# Altium PCB PCB1.PcbDoc (part 1 of 2)
Units mil, origin at the board's own origin, x right, y up, seen from the top; angles counter-clockwise.
Board outline 3870 x 3210 mil, 2 copper layers (Top Layer, Bottom Layer); 94 components, 94 nets, 473 pads, 156 vias.
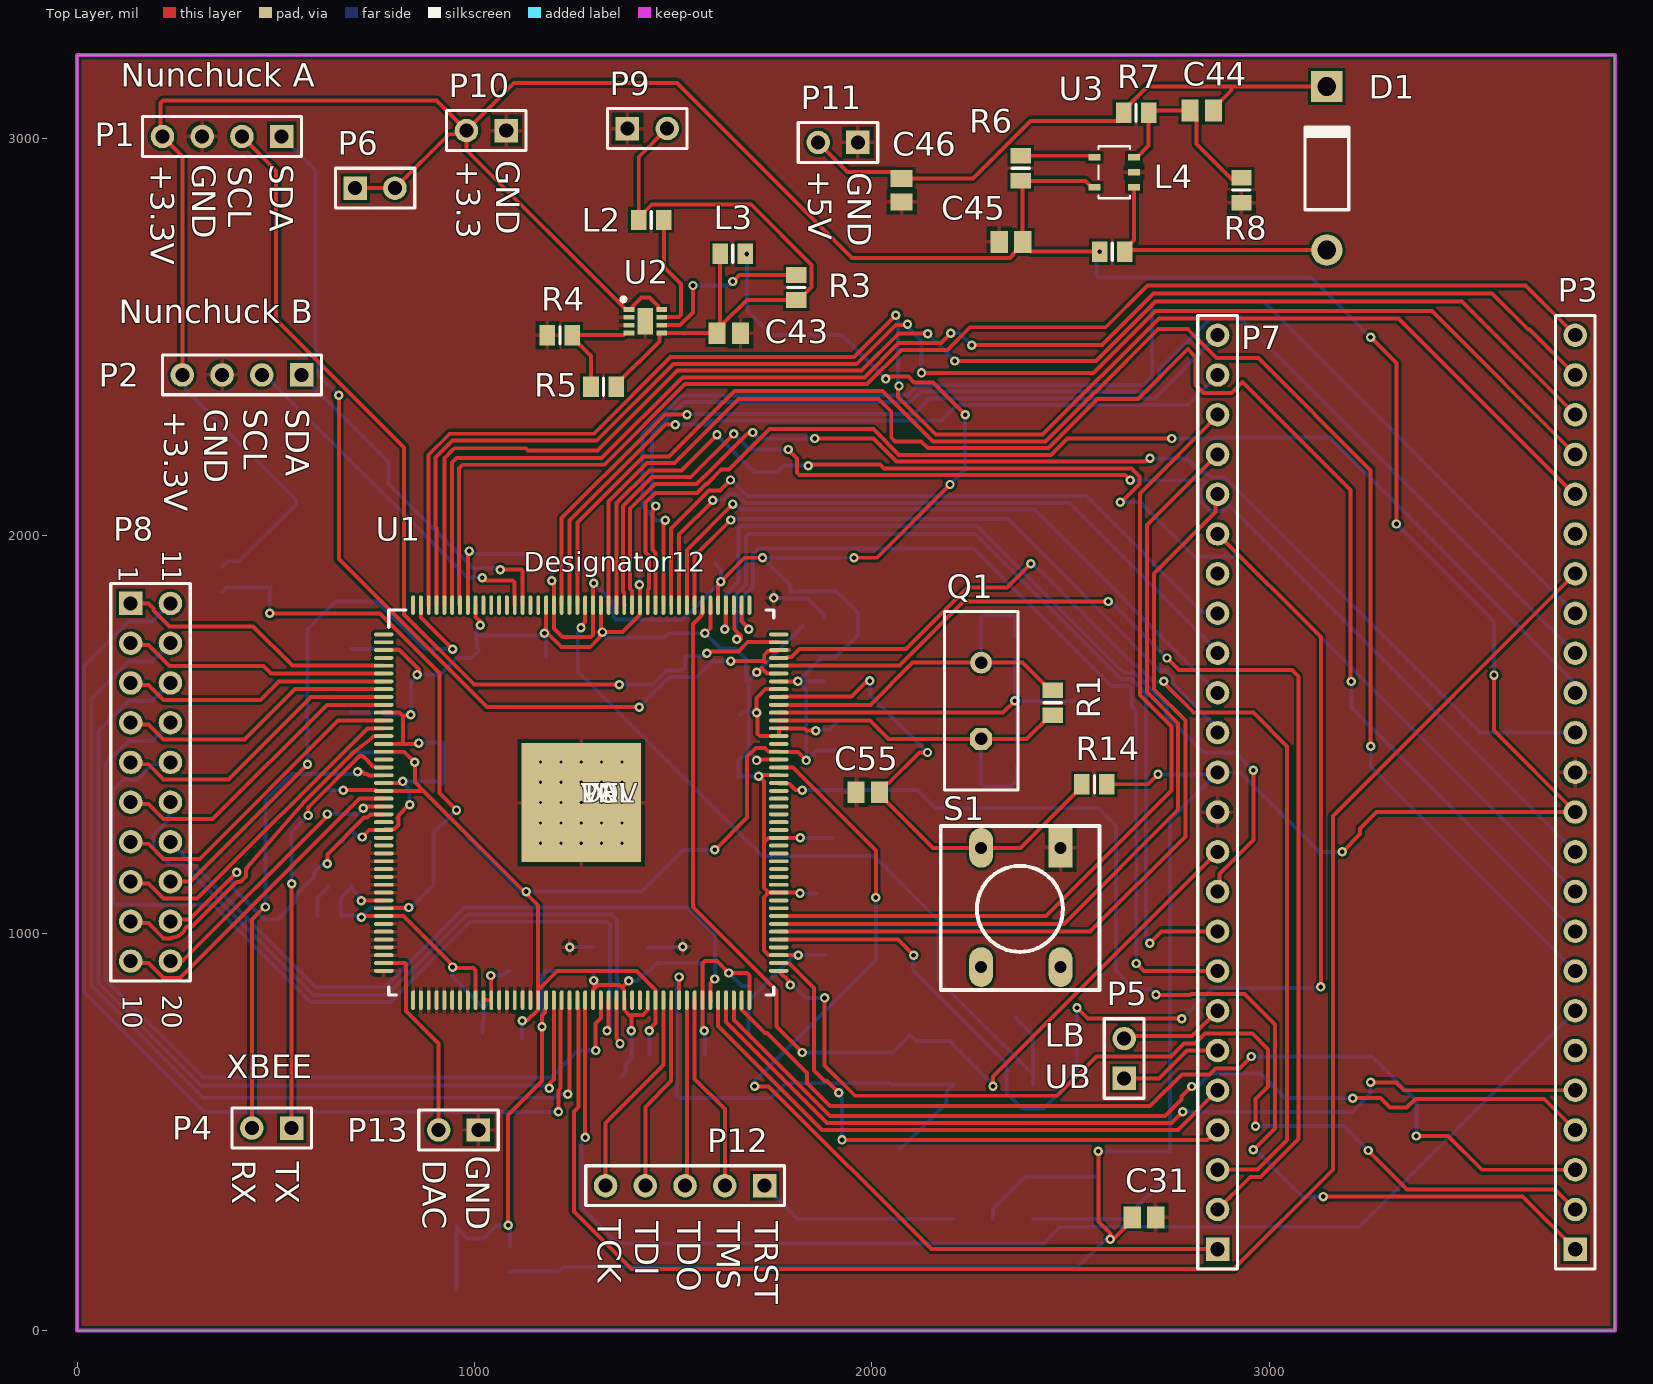
[diagram p0: Top Layer view]
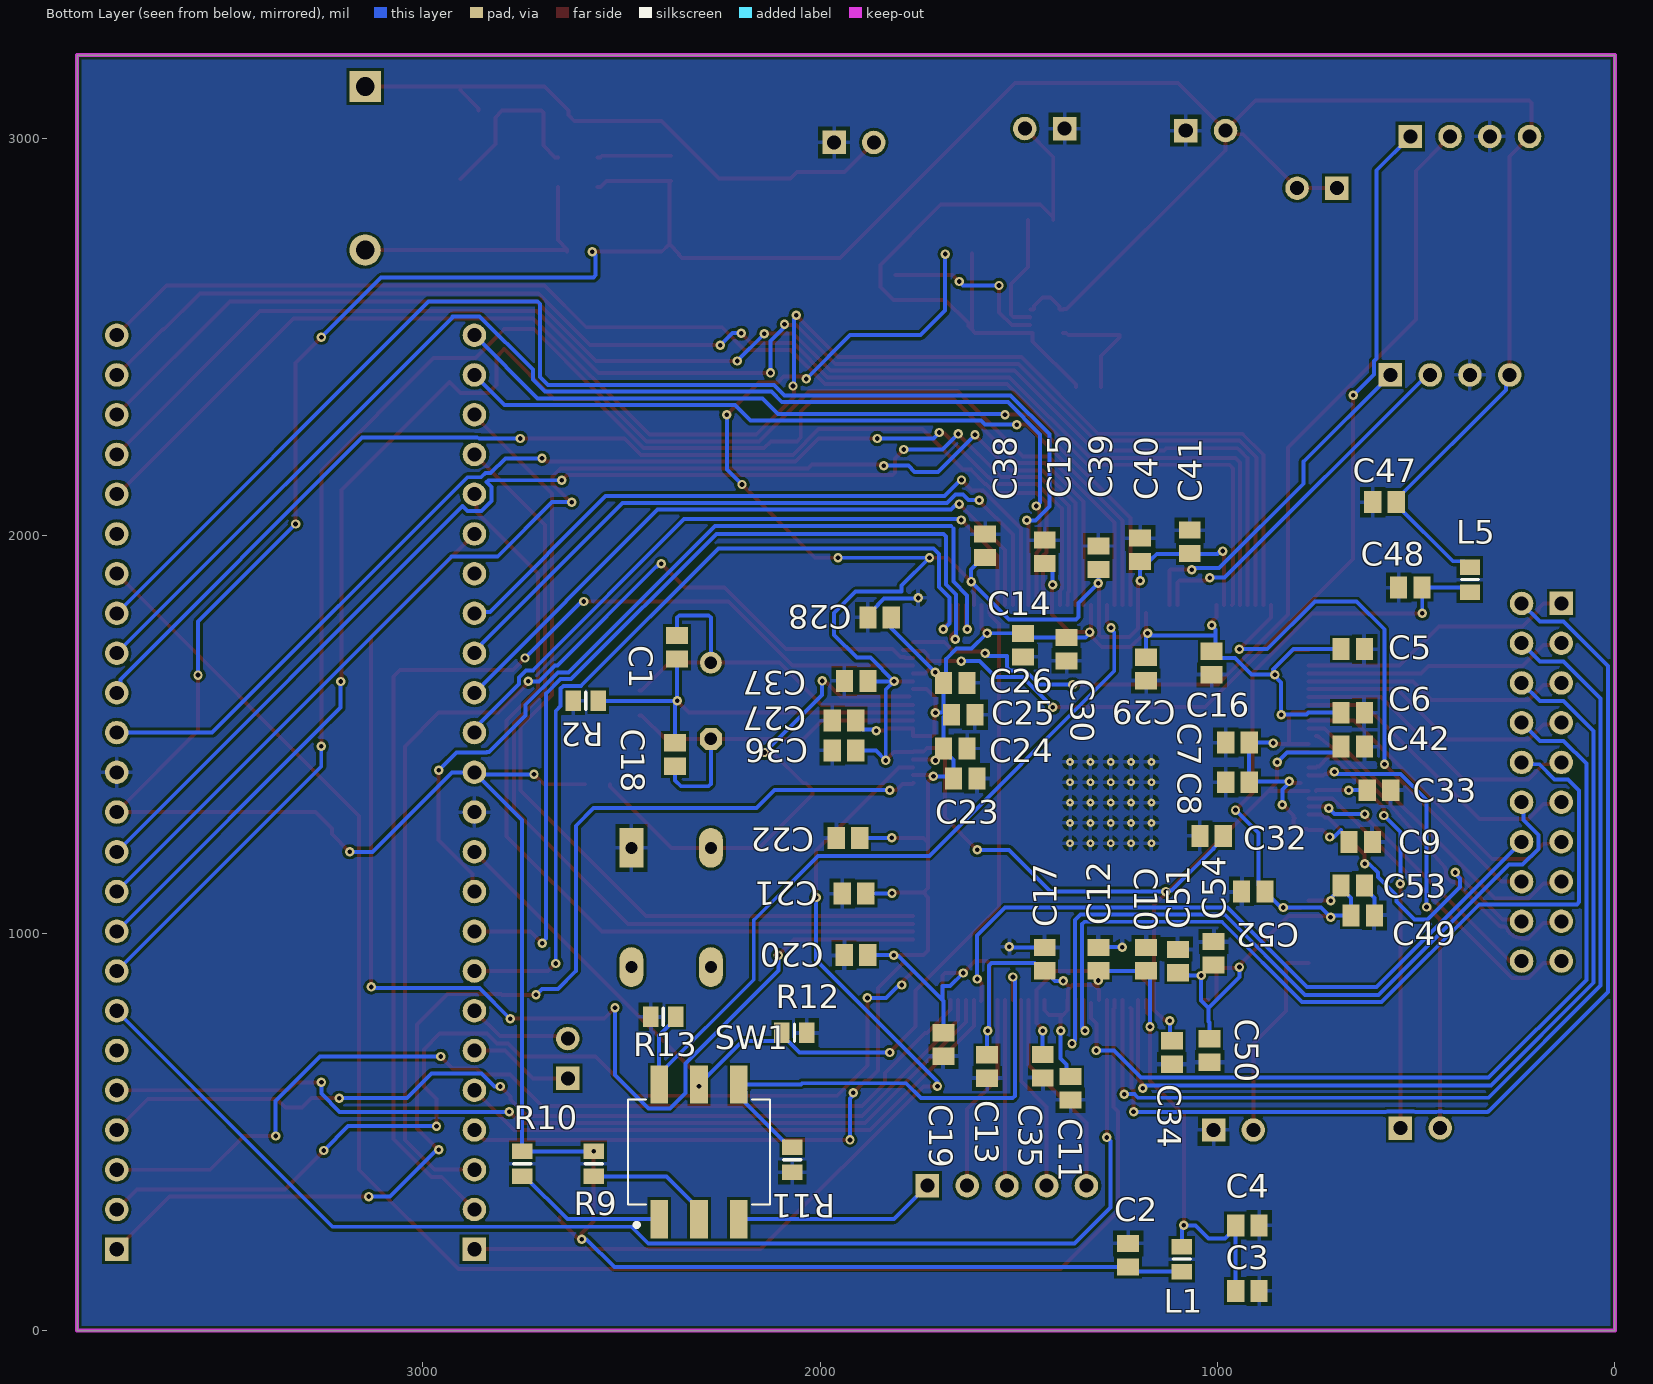
[diagram p1: Bottom Layer view, seen from below]

## Layer stack, top to bottom
Top Solder: solder mask 0.4, Solder Resist, Dk 3.5
Top Layer: signal copper 1.4
Dielectric 1: dielectric 12.6, FR-4, Dk 4.8
Bottom Layer: signal copper 1.4
Bottom Solder: solder mask 0.4, Solder Resist, Dk 3.5

## Board outline
0,0 0,3210 3870,3210 3870,0

## Design rules (kind name [scope] priority, off if disabled: settings)
Clearance Clearance_1 [All] p1: gap=7 ignorepadtopadclearanceinfootprint=FALSE
Clearance [All] p2: gap=10 ignorepadtopadclearanceinfootprint=FALSE except(0: Arc-Hole Track-Hole THPad-Hole Via-Hole Fill-Hole Poly-Hole Region-Hole Text-Hole; 7: SMDPad-SMDPad SMDPad-THPad SMDPad-Via SMDPad-Fill SMDPad-Poly SMDPad-Region SMDPad-Text SMDPad-Hole; 8: Arc-Arc Arc-Track Arc-SMDPad Arc-THPad Arc-Via Arc-Fill Arc-Poly Arc-Region Arc-Text Track-Track Track-SMDPad Track-THPad Track-Via Track-Fill Track-Poly Track-Region Track-Text)
DiffPairsRouting [All] p1: maxlimit=10 minlimit=5 mostfreqgap=10 toplayer_minwidth=15 toplayer_maxwidth=15 toplayer_prefwidth=15 bottomlayer_minwidth=15 bottomlayer_maxwidth=15 bottomlayer_prefwidth=15 maxuncoupledlength=500
MinimumSolderMaskSliver [All] p1: minsoldermaskwidth=5
PlaneConnect [All] p1: planeconnectstyle=Relief reliefexpansion=20 reliefentries=4 reliefconductorwidth=7 reliefairgap=10
PolygonConnect [All] p1: connectstyle=Relief reliefconductorwidth=10 reliefentries=4 polygonreliefangle="90 Angle" airgapwidth=10
RoutingVias [All] p1: holewidth=11.81 width=23.62 viastyle="Through Hole" minholewidth=11.81 minwidth=23.62 maxholewidth=11.81 maxwidth=23.62
SilkToSilkClearance [All] p1: silktosilkclearance=5
SilkToSolderMaskClearance [IsPad] p1: minsilkscreentomaskgap=5 clearancetoexposedcopper=TRUE
SolderMaskExpansion [All] p1: expansion=4 istentingtop=FALSE
Width [All] p1: maxlimit=10 minlimit=10 preferedwidth=10
25 further rules are at their usual default settings.

## Classes and differential pairs
component class Sheet3: C55 P12 P13 R9 R10 R11 R12 R13 R14 S1 SW1 U1
component class Sheet2: C1 C2 C3 C4 C5 C6 C7 C8 C9 C10 C11 C12 C13 C15 C16 C17 C18 C19 C20 C21 C22 C23 C24 C25 C26 C27 C28 C29 C30 C31 C32 C33 C34 C35 C36 C37 C38 C39 C40 C41 C42 C43 C44 C45 C46 C47 C48 C49 C50 C51 C52 C53 C54 D1 L1 L2 L3 L4 L5 P9 P10 P11 Q1 R1 R2 R3 R4 R5 R6 R7 R8 U2 U3
component class Sheet1: P1 P2 P3 P4 P5 P6 P7 P8

## Components (designator, comment, footprint, x,y, rotation, side; value= is the part's Value field where it differs from the comment)
C1 "36pF" C0805 2360,1720 r270 bottom
C2 "Cap Semi" C0805 1225,190 r270 bottom value=10uF
C3 "Cap Semi" C0805 925,100 r0 bottom value=10uF
C4 "Cap Semi" C0805 925,265 r0 bottom value=10uF
C5 "Cap Semi" C0805 660,1715 r0 bottom value=100nF
C6 "" C0805 660,1555 r0 bottom value=100nF
C7 "Cap Semi" C0805 950,1480 r180 bottom value=100nF
C8 "Cap Semi" C0805 950,1380 r180 bottom value=100nF
C9 "Cap Semi" C0805 640,1230 r0 bottom value=100nF
C10 "" C0805 1180,935 r270 bottom value=100nF
C11 "Cap Semi" C0805 1370,610 r90 bottom value=100nF
C12 "Cap Semi" C0805 1300,935 r270 bottom value=100nF
C13 "Cap Semi" C0805 1580,665 r90 bottom value=100nF
C14 "Cap Semi" C0805 1490,1725 r90 bottom value=100nF
C15 "Cap Semi" C0805 1435,1960 r270 bottom value=100nF
C16 "Cap Semi" C0805 1015,1680 r90 bottom value=100nF
C17 "Cap Semi" C0805 1435,935 r270 bottom value=100nF
C18 "36pF" C0805 2365,1450 r90 bottom
C19 "Cap Semi" C0805 1690,720 r270 bottom value=100nF
C20 "" C0805 1910,945 r0 bottom value=100nF
C21 "Cap Semi" C0805 1915,1100 r0 bottom value=100nF
C22 "Cap Semi" C0805 1930,1240 r0 bottom value=100nF
C23 "Cap Semi" C0805 1635,1390 r180 bottom value=100nF
C24 "" C0805 1660,1465 r180 bottom value=100nF
C25 "Cap Semi" C0805 1640,1550 r180 bottom value=100nF
C26 "Cap Semi" C0805 1660,1630 r180 bottom value=100nF
C27 "Cap Semi" C0805 1940,1535 r0 bottom value=100nF
C28 "Cap Semi" C0805 1850.47,1795 r0 bottom value=100nF
C29 "Cap Semi" C0805 1180,1665 r270 bottom value=100nF
C30 "Cap Semi" C0805 1380,1715 r270 bottom value=100nF
C31 "Cap Semi" C0805 2685,285 r180 top value=10uF
C32 "10uF" C0805 1015,1245 r180 bottom
C33 "2.2uF" C0805 593.82,1360 r0 bottom
C34 "2.2uF" C0805 1115,700 r90 bottom
C35 "2.2uF" C0805 1440,665.47 r90 bottom
C36 "2.2uF" C0805 1940,1460 r180 bottom
C37 "2.2uF" C0805 1909.53,1635 r180 bottom
C38 "2.2uF" C0805 1585,1975 r270 bottom
C39 "2.2uF" C0805 1300,1945 r270 bottom
C40 "2.2uF" C0805 1195,1965 r270 bottom
C41 "2.2uF" C0805 1070,1985 r270 bottom
C42 "2.2uF" C0805 660,1470 r0 bottom
C43 "22uF" C0805 1640,2510 r180 top
C44 "820pF" C0805 2830,3070 r0 top
C45 "4.7uF" C0805 2350,2740 r0 top
C46 "10uF" C0805 2075,2870 r270 top
C47 "2.2uF" C0805 580,2085 r180 bottom
C48 "2.2uF" C0805 515,1870 r180 bottom
C49 "100nF" C0805 635,1045 r0 bottom
C50 "100nF" C0805 1020,705 r90 bottom
C51 "100nF" C0805 1100,930 r270 bottom
C52 "100nF" C0805 910,1105 r180 bottom
C53 "100nF" C0805 660,1120 r0 bottom
C54 "100nF" C0805 1010,949.53 r270 bottom
C55 "100nF" C0805 1990,1355 r180 top
D1 "Diode 11DQ03" DO-204AL 3145,2925 r90 top
L1 "Inductor" 6-0805_L 1090,180 r90 bottom value=10mH
L2 "1uH" 6-0805_L 1445,2795 r180 top
L3 "220R" 6-0805_L 1650,2710 r0 top
L4 "3.3uH" 6-0805_L 2605,2715 r0 top
L5 "60R" 6-0805_L 365,1890 r270 bottom
P1 "Header 4" HDR1X4 515,3005 r180 top
P2 "Header 4" HDR1X4 565,2405 r180 top
P3 "Header 24" HDR1X24 3770,205 r90 top
P4 "Header 2" HDR1X2 540,510 r180 top
P5 "Header 2" HDR1X2 2635,635 r90 top
P6 "Header 2" HDR1X2 700,2875 r0 top
P7 "Header 24" HDR1X24 2870,205 r90 top
P8 "Header 10X2A" HDR2X10_CEN 135,1830 r270 top
P9 "Header 2" HDR1X2 1385,3025 r0 top
P10 "Header 2" HDR1X2 1080,3020 r180 top
P11 "Header 2" HDR1X2 1965,2990 r180 top
P12 "Header 5" HDR1X5 1730,365 r180 top
P13 "Header 2" HDR1X2 1010,505 r180 top
Q1 "ATS100B-E" HC-49U 2275,1585 r90 top value=10MHZ
R1 "1M" 6-0805_L 2455,1580 r90 top
R2 "0R" 6-0805_L 2590,1585 r0 bottom
R3 "178K" 6-0805_L 1810,2625 r270 top
R4 "39K2" 6-0805_L 1215,2505 r0 top
R5 "64.9K" 6-0805_L 1325,2375 r0 top
R6 "10K" 6-0805_L 2375,2925 r90 top
R7 "30K1" 6-0805_L 2665,3065 r0 top
R8 "10K" 6-0805_L 2930,2870 r270 top
R9 "820R" 6-0805_L 2570,420 r90 bottom
R10 "820R" 6-0805_L 2750,420 r90 bottom
R11 "2K2" 6-0805_L 2070,430 r90 bottom
R12 "2K2" 6-0805_L 2065,750 r0 bottom
R13 "2K2" 6-0805_L 2395,790 r180 bottom
R14 "2K2" 6-0805_L 2560,1375 r0 top
S1 "SW-PB" "SW PB" 2475,1215 r270 top
SW1 "219-3LPSTR" 3Switch*SW_219-3LPSTR3W219-3LPSTR(Primary) 2305,450 r90 bottom
U1 "TMS320F28379DPTP" PTP0176F_L 1268.82,1328.82 r0 top value=Value
U2 "TPS62080ADSGT" SON50P200X200X80-9N 1430,2540 r0 top
U3 "LMR62421XMFE/NOPB" DBV5-L 2610,2915 r180 top

## Footprints (in the part's own frame and the unit in brackets; to place one, negate y for a bottom-side part, rotate by r counter-clockwise, add the part's x,y. Pads: shape width x height; smd on the part's side, far side on the other; paste and mask are expansions set on the pad)
3Switch*SW_219-3LPSTR3W219-3LPSTR(Primary) [mm]
  rect 2.44x1.13 smd: 1(-4.305,2.54) 1_1(4.305,2.54) 2(-4.305,0) 2_1(4.305,0) 3(-4.305,-2.54) 3_1(4.305,-2.54)
  silkscreen extent -4.78,-4.55 3.35,4.54
6-0805_L [mm] "Chip Resistor, Body 2.0x1.2mm, IPC High Density"
  rect 1x1.3 smd: 1(-0.8,0) 2(0.8,0)
  silkscreen extent 0,-0.55 0,0.55, body extent -1.07,-0.7 1.07,0.7, height 0.7
C0805 [mm] "Chip Capacitor, Body 2.0x1.3mm, IPC High Density"
  rect 1.1x1.4 smd: 1(-0.75,0) 2(0.75,0)
  body extent -1.1,-0.72 1.1,0.72, height 1.4
DBV5-L [mil]
  rect 30.5x16 smd paste+0 mask+0: 1(-49.75,37.4) 2(-49.75,0) 3(-49.75,-37.4) 4(49.75,-37.4) 5(49.75,37.4)
  silkscreen extent -40,-65 40,65, body extent 0,0 10,10, height 10
DO-204AL [mm] "Diode, Axial; Body 5.2 x 2.7 mm (LxDia. max), Lead Dia. 0.86 mm (max)"
  round 2 hole 1.2: 1(-5.23,0)
  rect 2x2 hole 1.2: 2(5.23,0)
  silkscreen extent -2.65,-1.4 2.75,1.4
HC-49U [mm]
  oct 1.4x1.4 hole 0.8: 1(-2.44,0)
  round 1.4 hole 0.8: 2(2.44,0)
  silkscreen extent -5.7,-2.35 5.7,2.35
HDR1X2 [mm] "Connector; Header; 2 Position"
  rect 1.5x1.5 hole 0.9: 1(0,0)
  round 1.5 hole 0.9: 2(2.54,0)
  silkscreen extent -1.27,-1.27 3.81,1.27
HDR1X4 [mm] "Connector; Header; 4 Position"
  rect 1.5x1.5 hole 0.9: 1(0,0)
  round 1.5 hole 0.9: 2(2.54,0) 3(5.08,0) 4(7.62,0)
  silkscreen extent -1.27,-1.27 8.89,1.27
HDR1X5 [mm] "Connector; Header; 5 Position"
  rect 1.5x1.5 hole 0.9: 1(0,0)
  round 1.5 hole 0.9: 2(2.54,0) 3(5.08,0) 4(7.62,0) 5(10.16,0)
  silkscreen extent -1.27,-1.27 11.43,1.27
HDR1X24 [mm] "Connector; Header; 24 Position"
  rect 1.5x1.5 hole 0.9: 1(0,0)
  round 1.5 hole 0.9: 2(2.54,0) 3(5.08,0) 4(7.62,0) 5(10.16,0) 6(12.7,0) 7(15.24,0) 8(17.78,0) 9(20.32,0) 10(22.86,0) 11(25.4,0) 12(27.94,0) 13(30.48,0) 14(33.02,0) 15(35.56,0) 16(38.1,0) 17(40.64,0) 18(43.18,0) 19(45.72,0) 20(48.26,0) 21(50.8,0) 22(53.34,0) 23(55.88,0) 24(58.42,0)
  silkscreen extent -1.27,-1.27 59.69,1.27
HDR2X10_CEN [mm] "Connector; Header; 10x2 Position"
  rect 1.5x1.5 hole 0.9: 1(0,0)
  round 1.5 hole 0.9: 2(2.54,0) 3(5.08,0) 4(7.62,0) 5(10.16,0) 6(12.7,0) 7(15.24,0) 8(17.78,0) 9(20.32,0) 10(22.86,0) 11(0,2.54) 12(2.54,2.54) 13(5.08,2.54) 14(7.62,2.54) 15(10.16,2.54) 16(12.7,2.54) 17(15.24,2.54) 18(17.78,2.54) 19(20.32,2.54) 20(22.86,2.54)
  silkscreen extent -1.27,-1.27 24.13,3.81
PTP0176F_L [mm]
  oval 1.25x0.25 smd paste+0 mask+0.051: 1(-12.625,10.75) 2(-12.625,10.25) 3(-12.625,9.75) 4(-12.625,9.25) 5(-12.625,8.75) 6(-12.625,8.25) 7(-12.625,7.75) 8(-12.625,7.25) 9(-12.625,6.75) 10(-12.625,6.25) 11(-12.625,5.75) 12(-12.625,5.25) 13(-12.625,4.75) 14(-12.625,4.25) 15(-12.625,3.75) 16(-12.625,3.25) 17(-12.625,2.75) 18(-12.625,2.25) 19(-12.625,1.75) 20(-12.625,1.25) 21(-12.625,0.75) 22(-12.625,0.25) 23(-12.625,-0.25) 24(-12.625,-0.75) 25(-12.625,-1.25) 26(-12.625,-1.75) 27(-12.625,-2.25) 28(-12.625,-2.75) 29(-12.625,-3.25) 30(-12.625,-3.75) 31(-12.625,-4.25) 32(-12.625,-4.75) 33(-12.625,-5.25) 34(-12.625,-5.75) 35(-12.625,-6.25) 36(-12.625,-6.75) 37(-12.625,-7.25) 38(-12.625,-7.75) 39(-12.625,-8.25) 40(-12.625,-8.75) 41(-12.625,-9.25) 42(-12.625,-9.75) 43(-12.625,-10.25) 44(-12.625,-10.75) 89(12.625,-10.75) 90(12.625,-10.25) 91(12.625,-9.75) 92(12.625,-9.25) 93(12.625,-8.75) 94(12.625,-8.25) 95(12.625,-7.75) 96(12.625,-7.25) 97(12.625,-6.75) 98(12.625,-6.25) 99(12.625,-5.75) 100(12.625,-5.25) 101(12.625,-4.75) 102(12.625,-4.25) 103(12.625,-3.75) 104(12.625,-3.25) 105(12.625,-2.75) 106(12.625,-2.25) 107(12.625,-1.75) 108(12.625,-1.25) 109(12.625,-0.75) 110(12.625,-0.25) 111(12.625,0.25) 112(12.625,0.75) 113(12.625,1.25) 114(12.625,1.75) 115(12.625,2.25) 116(12.625,2.75) 117(12.625,3.25) 118(12.625,3.75) 119(12.625,4.25) 120(12.625,4.75) 121(12.625,5.25) 122(12.625,5.75) 123(12.625,6.25) 124(12.625,6.75) 125(12.625,7.25) 126(12.625,7.75) 127(12.625,8.25) 128(12.625,8.75) 129(12.625,9.25) 130(12.625,9.75) 131(12.625,10.25) 132(12.625,10.75)
  oval 0.25x1.25 smd paste+0 mask+0.051: 45(-10.75,-12.625) 46(-10.25,-12.625) 47(-9.75,-12.625) 48(-9.25,-12.625) 49(-8.75,-12.625) 50(-8.25,-12.625) 51(-7.75,-12.625) 52(-7.25,-12.625) 53(-6.75,-12.625) 54(-6.25,-12.625) 55(-5.75,-12.625) 56(-5.25,-12.625) 57(-4.75,-12.625) 58(-4.25,-12.625) 59(-3.75,-12.625) 60(-3.25,-12.625) 61(-2.75,-12.625) 62(-2.25,-12.625) 63(-1.75,-12.625) 64(-1.25,-12.625) 65(-0.75,-12.625) 66(-0.25,-12.625) 67(0.25,-12.625) 68(0.75,-12.625) 69(1.25,-12.625) 70(1.75,-12.625) 71(2.25,-12.625) 72(2.75,-12.625) 73(3.25,-12.625) 74(3.75,-12.625) 75(4.25,-12.625) 76(4.75,-12.625) 77(5.25,-12.625) 78(5.75,-12.625) 79(6.25,-12.625) 80(6.75,-12.625) 81(7.25,-12.625) 82(7.75,-12.625) 83(8.25,-12.625) 84(8.75,-12.625) 85(9.25,-12.625) 86(9.75,-12.625) 87(10.25,-12.625) 88(10.75,-12.625) 133(10.75,12.625) 134(10.25,12.625) 135(9.75,12.625) 136(9.25,12.625) 137(8.75,12.625) 138(8.25,12.625) 139(7.75,12.625) 140(7.25,12.625) 141(6.75,12.625) 142(6.25,12.625) 143(5.75,12.625) 144(5.25,12.625) 145(4.75,12.625) 146(4.25,12.625) 147(3.75,12.625) 148(3.25,12.625) 149(2.75,12.625) 150(2.25,12.625) 151(1.75,12.625) 152(1.25,12.625) 153(0.75,12.625) 154(0.25,12.625) 155(-0.25,12.625) 156(-0.75,12.625) 157(-1.25,12.625) 158(-1.75,12.625) 159(-2.25,12.625) 160(-2.75,12.625) 161(-3.25,12.625) 162(-3.75,12.625) 163(-4.25,12.625) 164(-4.75,12.625) 165(-5.25,12.625) 166(-5.75,12.625) 167(-6.25,12.625) 168(-6.75,12.625) 169(-7.25,12.625) 170(-7.75,12.625) 171(-8.25,12.625) 172(-8.75,12.625) 173(-9.25,12.625) 174(-9.75,12.625) 175(-10.25,12.625) 176(-10.75,12.625)
  rect 7.62x7.62 smd paste-10.987 mask+0.051: 177(0,0)
  round 0.5 / inner round 1.524 / far side round 0.5 hole 0.203 mask+0.051: V(-2.6,-2.6) V(-2.6,-1.3) V(-2.6,0) V(-2.6,1.3) V(-2.6,2.6) V(-1.3,-2.6) V(-1.3,-1.3) V(-1.3,0) V(-1.3,1.3) V(-1.3,2.6) V(0,-2.6) V(0,-1.3) V(0,0) V(0,1.3) V(0,2.6) V(1.3,-2.6) V(1.3,-1.3) V(1.3,0) V(1.3,1.3) V(1.3,2.6) V(2.6,-2.6) V(2.6,-1.3) V(2.6,0) V(2.6,1.3) V(2.6,2.6)
  silkscreen extent -12.3,-12.3 12.3,12.3, body extent 0,0 0.25,0.25, height 0.25
SON50P200X200X80-9N [mm]
  rect 0.7x0.3 smd: 1(-1.05,0.75) 2(-1.05,0.25) 3(-1.05,-0.25) 4(-1.05,-0.75) 5(1.05,-0.75) 6(1.05,-0.25) 7(1.05,0.25) 8(1.05,0.75)
  rect 1x1.7 smd: 9(0,0)
  silkscreen extent -1.52,1.28 -1.27,1.52, body extent -1.05,-1 1.05,1, height 0.8
"SW PB" [mil]
  rect 100x60 hole 30: 1(0,0)
  oval 100x60 hole 30: 2(0,-200) 3(300,-200) 4(300,0)
  silkscreen extent -55,-302 358,98

## Part data
C1 C18: library part 1004001100255, "CAP,36pF,+/-5%,C0G,50V,SMD0402", Manufacturer=MURATA, Manufacturer Part Number=GRM1555C1H360JA01D, Rating=5%, Embest PN=1004001100255, Part Type="Ceramic Capacitor"
C2 C3 C4 C31: "10uF", LatestRevisionDate=29-May-2009, LatestRevisionNote="IPC-7351 Footprint Added.", PackageDescription="Chip Capacitor", PackageReference=C1206, Published=8-Jun-2000, Publisher="Altium Limited"
C5 C7 C8 C9 C11 C12 C13 C14 C15 C16 C17 C19 C21 C22 C23 C25 C26 C27 C28 C29 C30: "100nF", LatestRevisionDate=29-May-2009, LatestRevisionNote="IPC-7351 Footprint Added.", PackageDescription="Chip Capacitor", PackageReference=C1206, Published=8-Jun-2000, Publisher="Altium Limited"
C6 C10 C20 C24: library part "Cap Semi", "100nF", LatestRevisionDate=29-May-2009, LatestRevisionNote="IPC-7351 Footprint Added.", PackageDescription="Chip Capacitor", PackageReference=C1206, Published=8-Jun-2000, Publisher="Altium Limited"
C32: library part 1004001100128, "CAP,10UF,+/-20%,X5R,6.3V,SMD0603", Manufacturer=MURATA, Manufacturer Part Number=GRM188R60J106ME47D, Rating=20%, Embest PN=1004001100128, Part Type="Ceramic Capacitor"
C33 C34 C35 C36 C37 C38 C39 C40 C41 C42 C47 C48: library part 1004001100059, "CAP,2.2UF,+/-20%,X5R,6.3V,SMD0402", Manufacturer=MURATA, Manufacturer Part Number=GRM155R60J225ME15D, Rating=20%, Embest PN=1004001100059, Part Type="Ceramic Capacitor"
C43: library part 1004001100130, "CAP,22UF,+/-20%,X5R,6.3V,SMD0603", Manufacturer=MURATA, Manufacturer Part Number=GRM188R60J226MEA0D, Rating=20%, Embest PN=1004001100130, Part Type="Ceramic Capacitor"
C44: library part 1004001100029, "CAP,820PF,+/-5%,C0G,50V,SMD0402", Manufacturer=MURATA, Manufacturer Part Number=GRM1555C1H821JA01D, Rating=5%, Embest PN=1004001100029, Part Type="Ceramic Capacitor"
C45: library part 1004001100218, "CAP,4.7UF,+/-20%,X5R,6.3V,SMD0402 fix PN add D（20151023）", Manufacturer=MURATA, Manufacturer Part Number=GRM155R60J475ME47D, Rating=20%, Embest PN=1004001100218, Part Type="Ceramic Capacitor"
C46: library part 1004001100183, "CAP,10UF,+/-10%,X7R,25V,SMD1210", Manufacturer=MURATA, Manufacturer Part Number=GRM32DR71E106KA12L, Rating=10%, Embest PN=1004001100183, Part Type="Ceramic Capacitor"
C49 C50 C51 C52 C53 C54 C55: library part 1004001100187, "CAP,100NF(0.1uf),+/-10%,X5R,10V,SMD0402", Manufacturer=MURATA, Manufacturer Part Number=GRM155R61A104KA01D, Rating=10%, Embest PN=1004001100187, Part Type="Ceramic Capacitor"
D1: "Schottky Rectifier", Code_JEDEC=DO-204-AL, ComponentLink1Description="Manufacturer Link", ComponentLink1URL=http://www.irf.com/, ComponentLink2Description=Datasheet, ComponentLink2URL=http://www.irf.com/product-info/datasheets/data/11dq03.pdf, DatasheetVersion=Dec-1997, LatestRevisionDate=17-Jul-2002, LatestRevisionNote="Re-released for DXP Platform.", PackageDescription="Diode, Axial; Body 5.2 x 2.7 mm (LxDia. max), Lead Dia. 0.86 mm (max)", PackageReference=DO-204AL, Published=8-Jun-2000, Publisher="Altium Limited"
L2: library part 1005001100053, "FIXED IND 1UH 1.62A 40 MOHM SMD,+/-30%", Manufacturer=MURATA, Manufacturer Part Number=LQH3NPN1R0NJ0L, Rating=1.62A, Embest PN=1005001100053, Part Type=Inductor
L3: library part 1005005100064, "FERRITE BEAD 220 OHM 0402,+/-25%", Manufacturer="Taiyo Yuden", Manufacturer Part Number=BKP1005EM221-T, Embest PN=1005005100064, Part Type="Ferrite Bead"
L4: library part 1005004100014, "Power Inductor,Magnetic shielded,3.3uH,1.4A,0.085ohm,3.8X3.8X1.6mm,SMD", Manufacturer=SUMIDA, Manufacturer Part Number=CDRH3D16/HPNP-3R3NC, Rating=1.4A, Embest PN=1005004100014, Part Type=Inductor
L5: library part 1005005100005, "Ferrite Bead,60ohm@100MHz,+/-25%,1700mA,0.06ohm,SMD0402", Manufacturer=MURATA, Manufacturer Part Number=BLM15PD600SN1D, Rating=1700mA, Embest PN=1005005100005, Part Type="Ferrite Bead"
P1 P2: "Header, 4-Pin", LatestRevisionDate=17-Jul-2002, LatestRevisionNote="Re-released for DXP Platform.", Publisher="Altium Limited"
P3 P7: "Header, 24-Pin", LatestRevisionDate=17-Jul-2002, LatestRevisionNote="Re-released for DXP Platform.", Publisher="Altium Limited"
P4 P5 P6 P9 P10 P11 P13: "Header, 2-Pin", LatestRevisionDate=17-Jul-2002, LatestRevisionNote="Re-released for DXP Platform.", Publisher="Altium Limited"
P8: "Header, 10-Pin, Dual row", LatestRevisionDate=17-Jul-2002, LatestRevisionNote="Re-released for DXP Platform.", Publisher="Altium Limited"
P12: "Header, 5-Pin", LatestRevisionDate=17-Jul-2002, LatestRevisionNote="Re-released for DXP Platform.", Publisher="Altium Limited"
Q1: library part 1008002200125, "Crystal 10.0000MHz 30ppm 18pF 60 Ohm -40°C - 85°C Through Hole HC49/US", Manufacturer=CTS, Embest PN=1008002200125, Manufacturer Part Number=ATS100B-E, Part Type=Crystal
R1: library part 1003001100155, "RES,1M,+/-1%,1/16W,SMD0402", Manufacturer=YAGEO, Manufacturer Part Number=RC0402FR-071ML, Rating=1%, Embest PN=1003001100155, Part Type="Thick film Resistor"
R2: library part 1003001100001, "RES,0R,+/-5%,1/16W,SMD0402", Manufacturer=YAGEO, Manufacturer Part Number=RC0402JR-070RL, Rating=5%, ASSY=NI, Embest PN=1003001100001, Part Type="Thick film Resistor"
R3: library part 1003001100723, "RES, 178K OHM, 1%, 1/10W, SMD0402", Manufacturer=PANASONIC, Manufacturer Part Number=ERJ-2RKF1783X, Rating=1%, Embest PN=1003001100723, Part Type="Thick film Resistor"
R4: library part 1003001100098, "RES,39K2,+/-1%,1/16W,SMD0402", Manufacturer=YAGEO, Manufacturer Part Number=RC0402FR-0739K2L, Rating=1%, Embest PN=1003001100098, Part Type="Thick film Resistor"
R5: library part 1003001100730, "RES, 64.9K OHM, 1%, 1/10W, SMD0402", Manufacturer=PANASONIC, Manufacturer Part Number=ERJ-2RKF6492X, Rating=1%, Embest PN=1003001100730, Part Type="Thick film Resistor"
R6 R8: library part 1003001100071, "RES,10K,+/-1%,1/16W,SMD0402", Manufacturer=YAGEO, Manufacturer Part Number=RC0402FR-0710KL, Rating=1%, Embest PN=1003001100071, Part Type="Thick film Resistor"
R7: library part 1003001100091, "RES,30K1,+/-1%,1/16W,SMD0402", Manufacturer=YAGEO, Manufacturer Part Number=RC0402FR-0730K1L, Rating=1%, Embest PN=1003001100091, Part Type="Thick film Resistor"
R9 R10: library part 1003001100482, "RES,820R,+/-1%,1/16W,SMD0402", Manufacturer=YAGEO, Manufacturer Part Number=RC0402FR-07820RL, Rating=1%, Embest PN=1003001100482, Part Type="Thick film Resistor"
R11 R12 R13 R14: library part 1003001100045, "RES,2K2,+/-1%,1/16W,SMD0402", Manufacturer=YAGEO, Manufacturer Part Number=RC0402FR-072K2L, Rating=1%, Embest PN=1003001100045, Part Type="Thick film Resistor"
S1: "DIGIKEY SW400-ND", LatestRevisionDate=17-Jul-2002, LatestRevisionNote="Re-released for DXP Platform.", Published=24-Mar-1999, Publisher="Altium Limited"
SW1: "Dip Switch SPST 3 Position Surface Mount Slide _Standard_ Actuator 100mA 20VDC", Package=None, Digi-Key_Part_Number=CT3115CT-ND, Digi-Key_Purchase_URL=https://www.digikey.com/product-detail/en/cts-electrocomponents/219-3LPSTR/CT3115CT-ND/5875767?utm_source=snapeda&utm_medium=aggregator&utm_campaign=symbol, MF="CTS Electrocomponents", MP=219-3LPSTR, SnapEDA_Link=https://www.snapeda.com/parts/219-3LPSTR/CTS%20Electrocomponents/view-part/571936/?ref=snap
U1: "Imported", Manufacturer="Texas Instruments", PartNumber=TMS320F28379DPTPS, RefDes=RefDes, TYPE=TYPE
U2: library part 1002005100089C, "IC REG BUCK SYNC ADJ 1.2A 8WSON", Manufacturer=TI, Embest PN=1002005100089C, Manufacturer Part Number=TPS62080ADSGT, Part Type=DC-DC
U3: library part 1002005100073C, "Conv DC-DC Single Step Up 2.7V to 5.5V 5-Pin SOT-23 T/R ,CUSTOMER SUPPLY", Manufacturer=TI, Embest PN=1002005100073C, Manufacturer Part Number=LMR62421XMFE/NOPB, Part Type=DC-DC
L1: Code_IEC=1005, Code_JEITA=0402, LatestRevisionDate=29-May-2009, LatestRevisionNote="IPC-7351 Footprint Added.", PackageDescription="Chip Inductor", PackageReference=0402-A, Published=8-Jun-2000, Publisher="Altium Limited"

## Via types
v1: diameter 23.62, hole 11.81, Top Layer to Bottom Layer, 156 vias

## Nets (pads, with @x,y where several pads share a name; then routed paths per layer and width w, separated by ;. In a path a pad name is that pad's centre, name@x,y a point inside that pad or via, vN(x,y) a via of type N, cw(c..) or ccw(c..) an arc to the next point about the centre after c; other vN are vias at no path point)
+1v2: C43.2 L2.2 L3.1 P9.2 R3.2 R5.2 U2.5 | length 1633.4
  Top Layer w10: R5.2@1356.5,2375 1356.5,2380.91 1465.16,2489.57 1465.16,2509.57 1466.06,2510.47 U2.5@1471.34,2510.47 1610,2510.47 C43.2@1618.5,2518.98 ; L2.2@1413.5,2795 L2.2@1413.5,2800.91 ; P9.2@1485,3025 1413.5,2953.5 L2.2@1413.5,2800.91 ; L3.1@1618.5,2710 C43.2@1618.5,2518.98 ; L2.2@1413.5,2800.91 1446.19,2833.59 1696.57,2833.59 1848.59,2681.57 1848.59,2626.19 1815.91,2593.5 R3.2@1810,2593.5 1685.43,2593.5 1627.13,2535.2 1627.13,2527.6 C43.2@1618.5,2518.98
+3v3: C2.2 C31.2 C45.2 C47.2 L1.1 L4.1 L5.1 P1.4 P2.4 P3.12 P6.1 P6.2 P7.13 P10.2 R6.1 R9.2 R10.2 R14.2 U2.1 U2.8 U3.5 | length 12079.2
  Top Layer w10: P2.4@265,2405 265,2955 P1.4@215,3005 210,3010 210,3089.14 215.86,3095 905,3095 P10.2@980,3020 ; P6.1@700,2875 P6.2@800,2875 935.61,3010.61 970.61,3010.61 P10.2@980,3020 ; U2.1@1387.76,2570.43 1379.88,2570.43 980,2970.32 P10.2@980,3020 ; U2.1@1388.66,2569.53 1396.54,2569.53 1397.44,2570.43 1397.44,2577.56 1419.88,2600 1440.12,2600 1461.69,2578.44 1461.69,2571.31 1463.46,2569.53 U2.8@1471.34,2569.53 ; U3.5@2560.25,2877.6 2553,2877.6 2537.09,2893.5 2379.53,2893.5 R6.1@2375,2893.5 2379.53,2888.98 C45.2@2379.53,2740 C45.2@2379.53,2734.09 ; v1(2570,451.5) 2570,274.56 2600,244.56 v1(2600,230) 2606.38,230 2655.47,279.09 C31.2@2655.47,285 ; v1(2573.5,2715) 2398.62,2715 C45.2@2379.53,2734.09 ; R14.2@2591.5,1375 2695,1375 v1(2720,1400) ; v1(3183.81,1205) 3228.21,1249.4 3228.21,1263.21 3270,1305 P3.12@3770,1305 3565,1510 3565,1649.23 v1(3565.54,1649.77) ; v1(3255,2500) 3320,2435 v1(3320,2030) ; P10.2@980,3020 1100,3140 1510,3140 1950.56,2699.44 2347.51,2699.44 2355.13,2707.06 2355.13,2709.69 C45.2@2379.53,2734.09
  Bottom Layer w10: P2.4@265,2405 274.39,2395.61 274.39,2366.99 550.47,2090.91 C47.2@550.47,2085 550.47,2079.09 407.56,1936.18 379.69,1936.18 L5.1@365,1921.5 ; L1.1@1090,148.5 1213.03,148.5 C2.2@1225,160.47 2517.91,160.47 2587.44,230 v1(2600,230) ; v1(2570,451.5) R10.2@2750,451.5 2750,1285 P7.13@2870,1405 ; v1(2573.5,2715) 2565,2706.5 2565,2655.86 2570.86,2650 3105,2650 v1(3255,2500) ; v1(2720,1400) 2865,1400 P7.13@2870,1405 ; v1(3183.81,1205) 3126.64,1205 2926.64,1405 P7.13@2870,1405 ; v1(3320,2030) 3565.54,1784.46 v1(3565.54,1649.77)
+5V: C44.2 C46.1 D1.2 P11.2 R7.1 | length 1500
  Top Layer w10: P11.2@1865,2990 1938.82,2916.18 2058.35,2916.18 C46.1@2075,2899.53 2254.37,2899.53 2399.25,3044.41 2618.82,3044.41 2633.5,3059.09 R7.1@2633.5,3065 2633.5,3070.91 2693.5,3130.91 2905,3130.91 ; C44.2@2859.53,3070 2859.53,3075.91 2905,3121.38 2905,3130.91 ; D1.2@3145,3130.91 2905,3130.91
DACOUTA: P13.2 U1.43 | length 528.2
  Top Layer w10: U1.43@791.38,925.2 771.85,925.2 U1.43@771.77,925.28 791.38,925.28 824.72,925.28 827.67,922.33 827.67,804.66 910,722.33 P13.2@910,505
EM1A0: P3.5 U1.85 | length 2364.3
  Top Layer w10: U1.85@1632.99,831.77 1633.07,831.69 1633.07,776.93 1887,523 2754.33,523 v1(2782.17,550.84) ; v1(3255,625) 3318.75,625 3338.75,605 P3.5@3770,605
  Bottom Layer w10: v1(2782.17,550.84) 3209.51,550.84 3255,596.33 v1(3255,625)
EM1A1: P3.4 U1.86 | length 2393.1
  Top Layer w10: U1.86@1652.68,831.77 1652.76,831.69 1652.76,782.24 1895,540 2737.65,540 2779.47,581.81 2779.47,589.18 v1(2804.89,614.6) ; v1(3210,585) 3280,585 3303.81,561.19 3345.73,561.19 3367.54,583 3692,583 P3.4@3770,505
  Bottom Layer w10: v1(2804.89,614.6) 2819.46,614.6 2852.38,647.53 2977.47,647.53 3040,585 v1(3210,585)
EM1A2: P3.3 U1.87 | length 2458.6
  Top Layer w10: U1.87@1672.36,831.77 1672.44,831.69 1672.44,807.76 1730.67,749.54 1735.92,749.54 1836.7,648.75 1836.7,623.3 1895,565 2700,565 2780,645 2849.86,645 2864.86,660 2925,660 v1(2955,690) ; v1(3370,490) 3450,490 3535,405 P3.3@3770,405
  Bottom Layer w10: v1(2955,690) 3258.22,690 3370,578.22 v1(3370,490)
EM1A3: P3.2 U1.89 | length 2644
  Top Layer w10: U1.89@1765.87,905.59 1765.53,905.59 1795,876.12 v1(1795,870) ; v1(1881.07,837.31) 1881.07,667.84 1957.73,591.19 2466.19,591.19 2565,690 2752.67,690 2785.67,723 2813.46,723 2837.98,747.53 2957.47,747.53 2997,708 2997,614.2 2965.3,582.5 v1(2965.3,514.7) ; v1(3249,453.5) 3346.97,355.53 3719.47,355.53 P3.2@3770,305
  Bottom Layer w10: v1(1795,870) 1801.12,870 1833.82,837.31 v1(1881.07,837.31) ; v1(2965.3,514.7) 3187.8,514.7 v1(3249,453.5)
EM1A4: P3.1 U1.113 | length 2968.7
  Top Layer w10: U1.113@1765.87,1378.03 1765.24,1378.03 1768,1375.27 1792.56,1375.27 1807.83,1360 v1(1825,1360) ; v1(2715,845) 2800.04,845 2802.57,847.53 2937.47,847.53 3014,771 3014,509 v1(2960,455) ; v1(3135.8,337.53) 3637.47,337.53 P3.1@3770,205
  Bottom Layer w10: v1(1825,1360) 2115,1360 2160,1315 2570,1315 2615,1270 2615,905 2660,860 2700,860 v1(2715,845) ; v1(2960,455) 2965,455 3082.47,337.53 v1(3135.8,337.53)
EM1A5: P7.1 U1.115 | length 2385.4
  Top Layer w10: v1(1705,615) 1740,615 2150,205 P7.1@2870,205 ; U1.115@1765.87,1417.4 1765.94,1417.32 1801.35,1417.32 2010,1208.67 v1(2010,1090)
  Bottom Layer w10: v1(1705,615) 1705,627.56 2010,932.56 v1(2010,1090)
EM1A6: P7.2 U1.128 | length 2893.7
  Top Layer w10: U1.128@1765.87,1673.31 2069.43,1673.31 2231.12,1835 v1(2595,1835) ; v1(2742.73,1692.73) 2772.98,1662.47 3057.53,1662.47 3073.51,1646.49 3073.51,482.6 2978.15,387.24 2952.24,387.24 P7.2@2870,305
  Bottom Layer w10: v1(2595,1835) 2600.46,1835 v1(2742.73,1692.73)
EM1A7: P7.3 U1.129 | length 2767.3
  Top Layer w10: U1.129@1765.87,1692.99 1765.94,1693.07 1785.47,1693.07 1788.16,1695.76 1798.33,1695.76 1817.58,1715 2085.66,1715 2240.66,1870 2340,1870 v1(2400,1930) ; v1(2734.24,1633.86) 2732.69,1632.31 2810,1555 2960,1555 3045,1470 3045,479.54 2970.69,405.24 2870.24,405.24 P7.3@2870,405
  Bottom Layer w10: v1(2400,1930) 2403.69,1930 2410.14,1923.54 2411.46,1923.54 2661.41,1673.59 2667.28,1673.59 2707.01,1633.86 v1(2734.24,1633.86)
EM1A8: P7.4 U1.90 | length 1460.2
  Top Layer w10: U1.90@1790,923.51 1792.97,923.51 1854.7,861.78 1854.7,654.31 1881.15,627.86 1887.38,627.86 v1(1916.43,598.81) ; v1(1925,480) 2845,480 P7.4@2870,505
  Bottom Layer w10: v1(1916.43,598.81) 1916.43,592.58 1925,584.02 v1(1925,480)
EM1A9: P7.19 U1.93 | length 3102.4
  Top Layer w10: U1.93@1765.87,984.33 2065.67,984.33 v1(2105,945) ; v1(2516.22,812.62) 2543.85,785 v1(2780,785) ; P7.19@2870,2005 3130,1745 v1(3130,865)
  Bottom Layer w10: v1(2105,945) 2105,906.73 2339.24,672.49 2339.24,598 2377.79,559.46 2432.21,559.46 2516.22,643.47 v1(2516.22,812.62) ; v1(2780,785) 2857.47,862.47 3127.47,862.47 v1(3130,865)
EM1A10: P7.20 U1.94 | length 2082.2
  Top Layer w10: U1.94@1765.87,1004.02 2549.02,1004.02 2789,1244 2789,1535.5 2710.43,1614.07 2710.43,1905.57 2865.33,2060.47 2865.33,2100.33 P7.20@2870,2105
EM1A11: P7.21 U1.95 | length 2124.2
  Top Layer w10: U1.95@1765.87,1023.7 2483.7,1023.7 2771,1311 2771,1528.04 2692.43,1606.62 2692.43,2027.43 P7.21@2870,2205
EM1A12: P7.22 U1.96 | length 2178.7
  Top Layer w10: U1.96@1765.87,1043.39 2438.39,1043.39 2753.81,1358.81 2753.81,1519.77 2674.43,1599.16 2674.43,2106.71 2870,2302.28 P7.22@2870,2305
EM1A13: P7.23 U1.156 | length 1995.1
  Top Layer w10: U1.156@1239.29,1825.87 1239.29,2038.33 1480.96,2280 v1(1505,2280)
  Bottom Layer w10: v1(1505,2280) 1585,2280 1595,2290 2175,2290 2213.81,2328.81 2793.81,2328.81 P7.23@2870,2405
EM1A14: P7.24 U1.157 | length 2059.8
  Top Layer w10: U1.157@1219.61,1825.87 1219.61,2044.61 1428.93,2253.93 1480,2305 v1(1535,2305)
  Bottom Layer w10: v1(1535,2305) 1537,2307 2106.34,2307 2145.15,2345.81 2710.81,2345.81 P7.24@2870,2505
EM1A15: P3.24 U1.170 | length 3396.5
  Top Layer w10: U1.170@963.7,1825.87 961.02,1828.55 961.02,2170 970.02,2179.01 1327.09,2179.01 1530.08,2382 1988.33,2382 2074.18,2467.85 2190.15,2467.85 2247.3,2525 2588.63,2525 2693.63,2630 3645,2630 P3.24@3770,2505
EM1A16: P3.23 U1.171 | length 3470.6
  Top Layer w10: U1.171@944.02,1825.87 944.02,2185.18 954.85,2196.01 1320.05,2196.01 1523.04,2399 1981.28,2399 2067.14,2484.85 2173.48,2484.85 v1(2198.67,2510.04) ; v1(2251.19,2480) 2578.63,2480 2708.63,2610 3560.86,2610 3650.86,2520 cw(c3650.86,2510) 3657.93,2517.07 P3.23@3770,2405
  Bottom Layer w10: v1(2198.67,2510.04) 2221.15,2510.04 v1(2251.19,2480)
EM1A17: P3.22 U1.172 | length 3558.3
  Top Layer w10: U1.172@924.33,1825.87 U1.172@924.33,1825.87 924.33,1826.02 924.33,2195.39 943.61,2214.67 949.47,2220.53 1129.47,2220.53 1135,2215 1310,2215 1511,2416 1974.24,2416 2066.91,2508.66 v1(2140.39,2508.66) ; v1(2208.96,2440) 2564.09,2440 2714.09,2590 3485,2590 P3.22@3770,2305
  Bottom Layer w10: v1@2140.39,2508.62 v1(2208.96,2440)
EM1A18: P3.21 U1.173 | length 3694.8
  Top Layer w10: U1.173@904.65,1825.87 904.65,2019.88 901.96,2022.57 901.96,2197.06 944.9,2240 1307.78,2240 1500.78,2433 1962.04,2433 2060.23,2531.19 2088.39,2531.19 v1(2089.67,2532.47) ; v1(2125,2410) 2558.13,2410 2713.66,2565.53 3409.47,2565.53 P3.21@3770,2205
  Bottom Layer w10: v1(2089.67,2532.47) 2089.67,2525.71 2125,2490.37 v1(2125,2410)
EM1A19: P3.20 U1.174 | length 3956.2
  Top Layer w10: U1.174@884.96,1825.87 884.96,2204.1 937.86,2257 1300.74,2257 1493.74,2450 1955,2450 v1(2060,2555) ; v1(2068.45,2377.26) 2065.86,2374.67 2065.86,2350 2160.86,2255 2430,2255 2722.53,2547.53 3088.43,2547.53 3088.96,2547 3325,2547 3767,2105 P3.20@3770,2105
  Bottom Layer w10: v1(2060,2555) 2060,2551.31 2065.86,2545.45 2065.86,2379.86 v1(2068.45,2377.26)
EM1BA0: P8.18 U1.175 | length 1394.8
  Top Layer w10: P8.18@235,1130 285,1130 v1(580,1425) ; U1.175@865.28,1825.87 865.2,1825.79 865.2,1794.8 v1(945,1715)
  Bottom Layer w10: v1(580,1425) 580,1765 650,1835 755,1835 875,1715 v1(945,1715)
EM1CLK: P8.13 U1.63 | length 2335.4
  Top Layer w10: v1(1188.2,610.43) 1190,612.23 1190,622.74 1199.92,632.67 U1.63@1199.92,831.77
  Bottom Layer w10: P8.13@235,1630 189.11,1584.11 128.97,1584.11 54,1509.14 54,875.54 312.27,617.27 1182.35,617.27 1188.2,611.41 v1(1188.2,610.43)
EM1CS0: P3.7 U1.67 | length 3305.4
  Top Layer w10: v1(1278.66,486.34) U1.67@1278.66,831.77
  Bottom Layer w10: v1(1278.66,486.34) 1270,477.68 1270,310 1360.52,219.48 2432.63,219.48 2474.71,261.56 3226.56,261.56 P3.7@3770,805
EM1CS2: P8.15 U1.70 | length 2246.4
  Top Layer w10: v1(1333.59,755) 1337.79,759.2 1337.79,831.69 U1.70@1337.72,831.77
  Bottom Layer w10: P8.15@235,1430 230.33,1425.33 190.47,1425.33 152.62,1387.47 117.93,1387.47 90,1359.54 90,1078.39 95.86,1072.53 341.56,1072.53 587.09,827 787.46,827 989.46,1029 1334.7,1029 1340.56,1023.14 1340.56,760.86 1334.7,755 v1(1333.59,755)
EM1CS3: P8.16 U1.71 | length 1972.7
  Top Layer w10: U1.71@1357.26,834.42 1357.4,834.28 U1.71@1357.4,831.77 1357.4,735.09 1366.34,726.14 v1(1366.34,722.46)
  Bottom Layer w10: P8.16@235,1330 230.33,1325.33 230.33,1285.47 192.47,1247.62 192.47,1212.38 232.33,1172.53 267.02,1172.53 594.54,845 780,845 982,1047 1345,1047 1358.56,1033.44 1358.56,730.24 v1(1366.34,722.46)
EM1CS4: P8.11 U1.64 | length 2686.5
  Top Layer w10: v1(1211.35,551.17) 1211.35,604.86 1216.92,610.43 1216.92,809.56 U1.64@1219.53,812.17
  Bottom Layer w10: P8.11@235,1830 189.11,1784.11 128.97,1784.11 18,1673.14 18,852 317.07,552.93 ccw(c324.14,560) 324.14,550 427.55,550 ccw(c427.55,560) 429.96,550.3 cw(c440,510) 450.04,550.3 ccw(c452.45,560) 452.45,550 500.19,550 ccw(c500.19,560) 502.35,550.24 507.11,551.29 cw(c509.29,541.53) 509.33,551.53 570.67,551.53 cw(c570.71,541.53) 572.9,551.29 577.65,550.24 ccw(c579.81,560) 579.81,550 1185,550 1210.19,550 v1(1211.35,551.17)
EM1D0: P3.8 U1.155 | length 4131.1
  Top Layer w10: U1.155@1258.98,1825.87 1258.98,2033.98 1425,2200 1490,2200 1655,2365 2026.82,2365 2153.82,2238 2437.04,2238 2561.04,2362 2562.46,2362 2720.46,2520 2795,2520 2823.69,2491.31 2823.69,2491.16 2867.33,2447.53 2972.47,2447.53 3255,2165 3255,1471.24 v1(3255.44,1470.79)
  Bottom Layer w10: v1(3255.44,1470.79) 3255.44,1419.56 P3.8@3770,905
EM1D1: P3.9 U1.151 | length 3982.9
  Top Layer w10: U1.151@1337.72,1825.87 1337.72,2086.76 1433.96,2183 1503,2183 1665,2345 2016.92,2345 2048.86,2313.06 2048.86,2247.96 2058.82,2238 2123.92,2238 2140.92,2221 2444.08,2221 2568.08,2345 2670,2345 2795,2470 2815,2450 2815,2380 2835,2360 2905,2360 2932.5,2387.5 3020,2300 3205,2115 3205,1635 3206.29,1633.71 v1(3206.68,1633.71)
  Bottom Layer w10: v1(3206.68,1633.71) 3206.68,1568.32 P3.9@3770,1005